# Altium PCB WiFiShield.PcbDoc
Units mm, origin at the board's own origin, x right, y up, seen from the top; angles counter-clockwise.
Board outline 67.89 x 33.03 mm, 2 copper layers (Top Layer, Bottom Layer); 18 components, 21 nets, 91 pads, 23 vias.
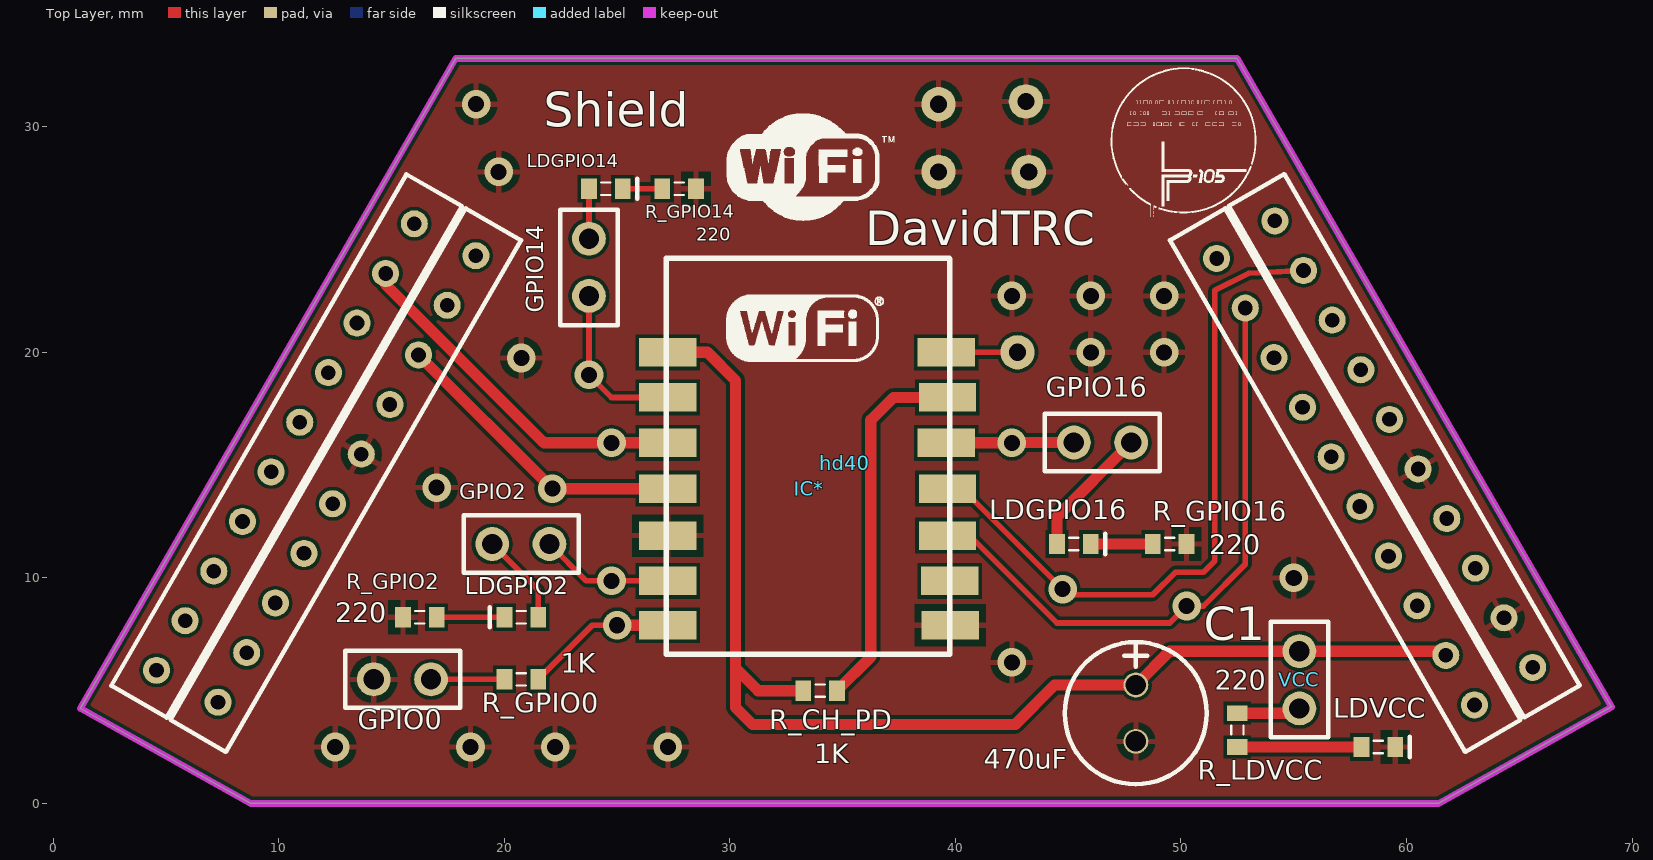
[diagram p0: Top Layer view]
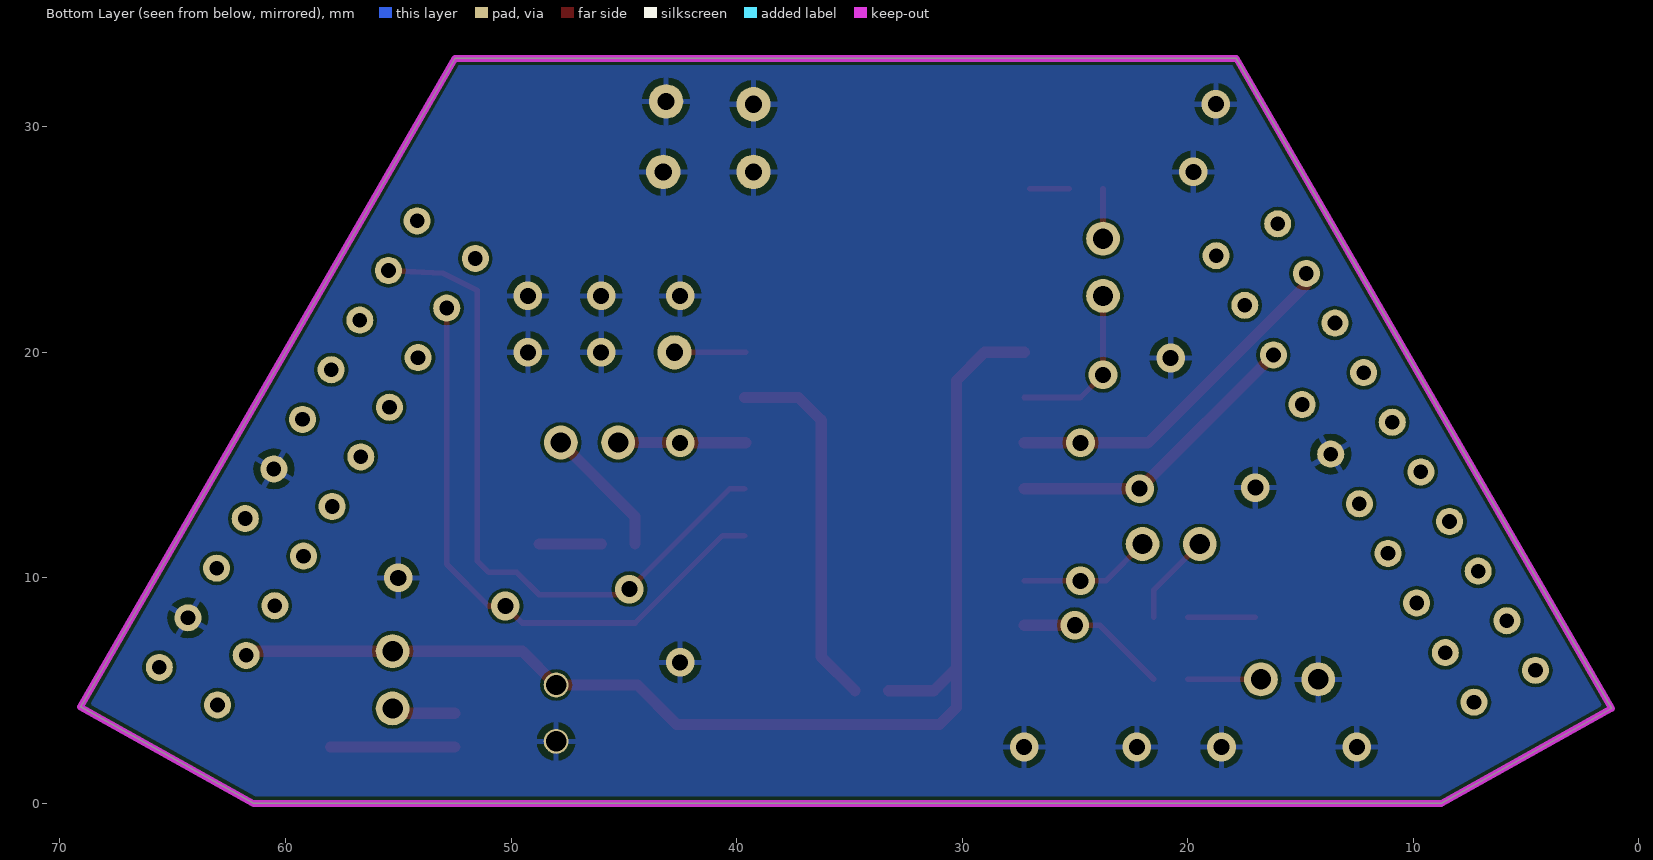
[diagram p1: Bottom Layer view, seen from below]

## Layer stack, top to bottom
Top Solder: solder mask 0.0102, Solder Resist, Dk 3.5
Top Layer: signal copper 0.0356
Dielectric 1: dielectric 0.32, FR-4, Dk 4.8
Bottom Layer: signal copper 0.0356
Bottom Solder: solder mask 0.0102, Solder Resist, Dk 3.5

## Board outline
8.75,0 61.421,0 69.091,4.281 69.085,4.277 52.483,33.03 17.843,33.03 1.203,4.212 1.214,4.206

## Design rules (kind name [scope] priority, off if disabled: settings)
Clearance [All] p1: gap=0.15
HoleSize [All] p1: absolutevalues=TRUE maxlimit=6.3 minlimit=0.3 maxpercent=80.000 minpercent=20.000
PolygonConnect [All] p1: connectstyle=Relief reliefconductorwidth=0.25 reliefentries=4 polygonreliefangle="90 Angle" airgapwidth=0.3
RoutingVias [All] p1: holewidth=0.3 width=0.6 viastyle="Through Hole" minholewidth=0.3 minwidth=0.6 maxholewidth=6.3 maxwidth=10.6
SilkToSilkClearance [All] p1: silktosilkclearance=0.15
SilkToSolderMaskClearance [IsPad] p1: minsilkscreentomaskgap=0.15 clearancetoexposedcopper=TRUE
SolderMaskExpansion [All] p1: expansion=0.102
UnpouredPolygon [All] p1: allowunpoured=FALSE
Width [All] p1: maxlimit=10 minlimit=0.15 preferedwidth=0.25
26 further rules are at their usual default settings.

## Components (designator, comment, footprint, x,y, rotation, side; value= is the part's Value field where it differs from the comment)
C1 "Cap Pol" "CAP POL 6.3x11 Pitch 2.5mm" 48,5.25 r270 top
GPIO0 "Header-1x2" HEADER-1x2 15.5,5.5 r0 top
GPIO2 "Header-1x2" HEADER-1x2 20.75,11.5 r0 top
GPIO14 "Header-1x2" HEADER-1x2 23.75,23.75 r270 top
GPIO16 "Header-1x2" HEADER-1x2 46.5,16 r180 top
hd40 "header" header_cognitiveNGD 19.833,13.08 r0 top locked
IC* "ESP8266 ESP-03" "ESP8266 ESP-03" 27.301,6.741 r0 top
LDGPIO2 "LED" "0603 LED-BLUE" 20.75,8.25 r180 top
LDGPIO14 "LED" "0603 LED-BLUE" 24.5,27.25 r0 top
LDGPIO16 "LED" "0603 LED-Green" 45.25,11.5 r0 top
LDVCC "LED" "0603 LED-RED" 58.75,2.5 r0 top
R_CH_PD "Res" "0603 Res" 34,5 r0 top
R_GPIO0 "Res" "0603 Res" 20.75,5.5 r0 top
R_GPIO2 "Res" "0603 Res" 16.25,8.25 r180 top
R_GPIO14 "Res" "0603 Res" 27.75,27.25 r0 top
R_GPIO16 "Res" "0603 Res" 49.5,11.5 r0 top
R_LDVCC "Res" "0603 Res" 52.5,3.25 r90 top
VCC "Header-1x2" HEADER-1x2 55.25,5.5 r90 top

## Footprints (in the part's own frame and the unit in brackets; to place one, negate y for a bottom-side part, rotate by r counter-clockwise, add the part's x,y. Pads: shape width x height; smd on the part's side, far side on the other; paste and mask are expansions set on the pad)
"0603 LED-BLUE" [mm] "LED, Body 1.6x0.8mm, IPC High Density"
  rect 0.7x0.9 smd: 1(-0.75,0) 2(0.75,0)
  silkscreen extent -0.2,-0.45 1.4,0.45, body extent -0.85,-0.45 0.85,0.45, height 0.9
"0603 LED-Green" [mm] "LED, Body 1.6x0.8mm, IPC High Density"
  rect 0.7x0.9 smd: 1(-0.75,0) 2(0.75,0)
  silkscreen extent -0.2,-0.45 1.4,0.45, body extent -0.85,-0.45 0.85,0.45, height 0.9
"0603 LED-RED" [mm] "LED, Body 1.6x0.8mm, IPC High Density"
  rect 0.7x0.9 smd: 1(-0.75,0) 2(0.75,0)
  silkscreen extent -0.2,-0.45 1.4,0.45, body extent -0.85,-0.45 0.85,0.45, height 0.9
"0603 Res" [mm] "Chip Resistor, Body 1.6x0.8mm, IPC High Density"
  rect 0.7x0.9 smd: 1(-0.75,0) 2(0.75,0)
  silkscreen extent -0.2,-0.28 0.2,0.28, body extent -0.78,-0.43 0.78,0.43, height 0.44
"CAP POL 6.3x11 Pitch 2.5mm" [mm]
  round 1.1 hole 0.9: 1(0,0) 2(2.5,0)
  silkscreen extent -1.9,-3.16 4.4,3.14, body extent -1.9,-3.15 4.4,3.14, height 11
"ESP8266 ESP-03" [mil] "ESP8266 ESP-03"
  rect 100x50 smd: 1(-2,522) 2(-2,443.27) 3(-2,364) 4(-2,284) 5(-2,202) 6(-2,123) 7(-2,45.57) 8(491,45.57) 9(490,123) 10(486,202) 11(486,284) 12(484,364) 13(486,443.27) 14(484,522)
  silkscreen extent -5,-5 490,686, body extent -1,1 483,682, height 134
HEADER-1x2 [mm]
  round 1.5 hole 0.9: 1(-1.29,0) 2(1.25,0)
  silkscreen extent -2.56,-1.27 2.55,1.27, body extent -2.57,-1.24 2.52,1.25, height 8.54
header_cognitiveNGD [mm]
  round 1.2 / inner oval 2.5x1.2 / far side round 1.2 hole 0.65: 00(-3.826,12.617) 01(-5.096,10.417) 02(-6.366,8.217) 03(-7.636,6.018) 04(-8.906,3.818) 05(-10.176,1.618) 06(-11.446,-0.581) 07(-12.716,-2.781) 08(-13.986,-4.981) 09(-15.256,-7.181) 10(-12.527,-8.594) 11(-11.257,-6.395) 12(-9.987,-4.195) 13(-8.717,-1.995) 14(-7.447,0.204) 15(-6.177,2.404) 16(-4.907,4.604) 17(-3.637,6.804) 18(-2.367,9.003) 19(-1.097,11.203) 20(31.747,11.082) 21(33.017,8.882) 22(34.287,6.682) 23(35.557,4.483) 24(36.827,2.283) 25(38.097,0.083) 26(39.367,-2.116) 27(40.637,-4.316) 28(41.907,-6.516) 29(43.177,-8.716) 30(45.761,-7.051) 31(44.491,-4.851) 32(43.221,-2.651) 33(41.951,-0.452) 34(40.681,1.748) 35(39.411,3.948) 36(38.141,6.148) 37(36.871,8.347) 38(35.601,10.547) 39(34.331,12.747)
  silkscreen extent -17.26,-10.79 47.84,14.82, body extent -16.97,-10.43 47.5,14.46, height 7

## Part data
hd40: library part header_cognitiveNGD

## Free pads (board coordinates)
  round 1.524 hole 0.762: 0(39.25,31) 1(43.125,31.125) 2(39.25,28) 2(42.75,20) 3(43.25,28)

## Via types
v1: diameter 1.27, hole 0.711, Top Layer to Bottom Layer, 23 vias

## Nets (pads, with @x,y where several pads share a name; then routed paths per layer and width w, separated by ;. In a path a pad name is that pad's centre, name@x,y a point inside that pad or via, vN(x,y) a via of type N, cw(c..) or ccw(c..) an arc to the next point about the centre after c; other vN are vias at no path point)
GND: C1.2 GPIO0.1 hd40.15 hd40.31 hd40.34 IC*.5 IC*.8 LDVCC.2 pad.0 pad.1 pad.2@39.25,28 pad.3 R_GPIO2.2 R_GPIO14.2 R_GPIO16.2
  other v1: 12.5,2.5 18.5,2.5 22.25,2.5 27.25,2.5 42.5,6.25 55,10 17,14 20.75,19.75 46,20 49.25,20 42.5,22.5 46,22.5 49.25,22.5 19.75,28 18.75,31
NetGPIO0_2: GPIO0.2 R_GPIO0.1 | length 3.3
  Top Layer w0.254: GPIO0.2 R_GPIO0.1
NetGPIO2_1: GPIO2.1 LDGPIO2.1 | length 4.1
  Top Layer w0.254: GPIO2.1 21.5,9.46 LDGPIO2.1
NetGPIO2_2: GPIO2.2 IC*.6 | length 5.9
  Top Layer w0.254: GPIO2.2 23.635,9.865 IC*.6
  other v1: 24.75,9.865
NetGPIO14_1: GPIO14.1 LDGPIO14.1 | length 2.2
  Top Layer w0.254: GPIO14.1 LDGPIO14.1
NetGPIO14_2: GPIO14.2 IC*.2 | length 7.4
  Top Layer w0.254: GPIO14.2 v1(23.75,19) 24.75,18 IC*.2
NetGPIO16_1: GPIO16.1 LDGPIO16.1 | length 5.9
  Top Layer w0.5: LDGPIO16.1 44.5,12.71 GPIO16.1
NetGPIO16_2: GPIO16.2 IC*.12 | length 5.7
  Top Layer w0.5: IC*.12 42.987,15.987 43,16 GPIO16.2
  other v1: 42.5,15.987
Nethd40_01: hd40.01 IC*.3 | length 15.9
  Top Layer w0.5: hd40.01 14.737,23.013 21.763,15.987 IC*.3
  other v1: 24.75,15.987
Nethd40_17: hd40.17 IC*.4 | length 13.5
  Top Layer w0.5: hd40.17 v1(22.124,13.955) IC*.4
Nethd40_21: hd40.21 IC*.10 | length 27.2
  Top Layer w0.254: IC*.10 40.628,11.872 44.5,8 49.5,8 v1(50.25,8.75) 51,8.75 52.85,10.6 hd40.21
Nethd40_38: hd40.38 IC*.11 | length 30.5
  Top Layer w0.254: IC*.11 40.295,13.955 v1(44.75,9.5) 45,9.25 48.75,9.25 49.75,10.25 51,10.25 51.5,10.75 51.5,22.75 53,23.5 hd40.38
NetIC*_7: IC*.7 R_GPIO0.2 | length 6.7
  Top Layer w0.254: R_GPIO0.2 23.899,7.899 v1(25,7.899)
  Top Layer w0.5: v1(25,7.899) IC*.7
NetIC*_13: IC*.13 R_CH_PD.2 | length 16.4
  Top Layer w0.5: R_CH_PD.2 36.25,6.5 36.25,17 37.25,18 IC*.13
NetIC*_14: IC*.14 pad.2@42.75,20 | length 3.2
  Top Layer w0.254: IC*.14 pad.2@42.75,20
NetLDGPIO2_2: LDGPIO2.2 R_GPIO2.1 | length 3
  Top Layer w0.254: R_GPIO2.1 LDGPIO2.2
NetLDGPIO14_2: LDGPIO14.2 R_GPIO14.1 | length 1.8
  Top Layer w0.254: LDGPIO14.2 R_GPIO14.1
NetLDGPIO16_2: LDGPIO16.2 R_GPIO16.1 | length 2.7
  Top Layer w0.5: LDGPIO16.2 R_GPIO16.1
NetLDVCC_1: LDVCC.1 R_LDVCC.1 | length 5.5
  Top Layer w0.5: R_LDVCC.1 LDVCC.1
NetR_LDVCC_2: R_LDVCC.2 VCC.1 | length 2.8
  Top Layer w0.5: R_LDVCC.2 55.04,4 VCC.1
VCC: C1.1 hd40.28 IC*.1 R_CH_PD.1 VCC.2 | length 54.7
  Top Layer w0.5: IC*.1 29,20 30.25,18.75 30.25,6 ; R_CH_PD.1 31.25,5 30.25,6 ; hd40.28 61.555,6.75 56,6.75 49.5,6.75 C1.1 44.4,5.25 42.65,3.5 31,3.5 30.25,4.25 30.25,6
pads on no net: hd40.00 hd40.02 hd40.03 hd40.04 hd40.05 hd40.06 hd40.07 hd40.08 hd40.09 hd40.10 hd40.11 hd40.12 hd40.13 hd40.14 hd40.16 hd40.18 hd40.19 hd40.20 hd40.22 hd40.23 hd40.24 hd40.25 hd40.26 hd40.27 hd40.29 hd40.30 hd40.32 hd40.33 hd40.35 hd40.36 hd40.37 hd40.39 IC*.9

## Polygon pours and split planes (outlines as drawn)
GND on Top Layer "GND_UP" (solid, remove dead copper, pour order 2): 17.843,33.03 52.483,33.03 69.091,4.281 61.421,0 8.75,0 1.203,4.212
GND on Bottom Layer "GND_DOWN" (solid, remove dead copper, pour order 4): 17.843,33.03 52.483,33.03 69.075,4.272 61.421,0 8.75,0 1.214,4.206 17.843,33.03

## Keep-outs
Keep-Out Layer:
  lines w0.3: 1.203,4.212 17.843,33.03 52.483,33.03 69.085,4.277 ; 1.214,4.206 8.75,0 61.421,0 69.091,4.281

## Silkscreen, mask and mechanical layers (free items; w line width, h text height)
Top Overlay:
  drawing of 76 lines, arcs and shapes, not listed
  text "Shield" at 21.75,30 h1.52
  text "220" at 28.5,24.75 h1
  text "DavidTRC" at 36,24.75 h1.52
  text "220" at 51.25,10.75 h1.5
  text "220" at 12.5,7.75 h1.5
  text "1K" at 22.5,5.5 h1.5
  text "220" at 51.5,4.75 h1.5
  text "1K" at 33.75,1.5 h1.5
  text "470uF" at 41.25,1.25 h1.5